# Altium PCB pcb.PcbDoc
Units mm, origin at the board's own origin, x right, y up, seen from the top; angles counter-clockwise.
Board outline 50 x 50 mm, 2 copper layers (Top Layer, Bottom Layer), stack 1.58 mm thick; 18 components, 28 nets, 115 pads, 58 vias.
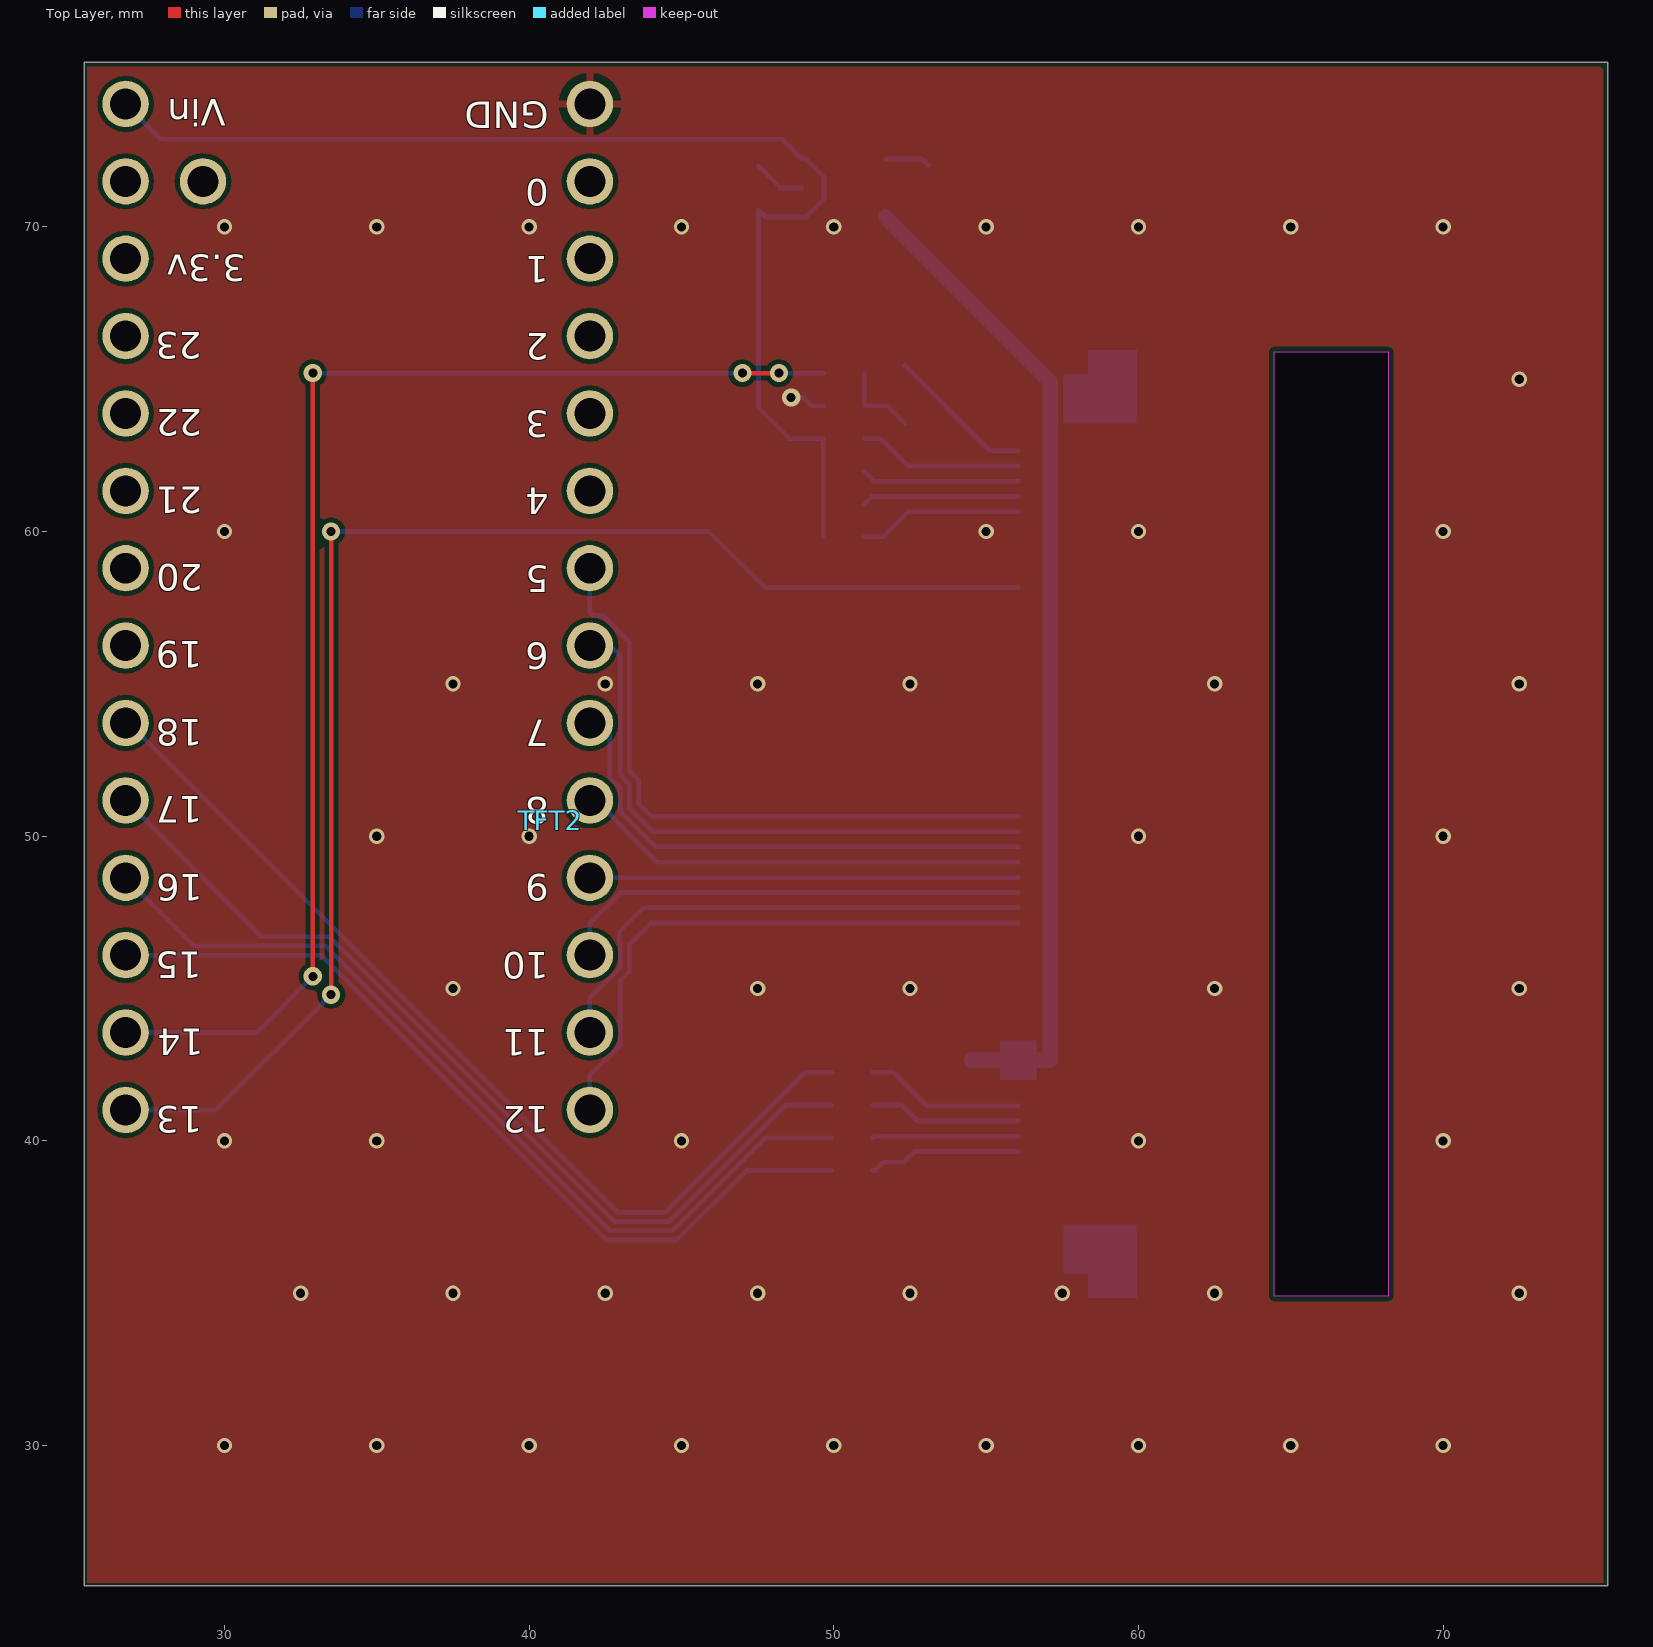
[diagram p0: Top Layer view]
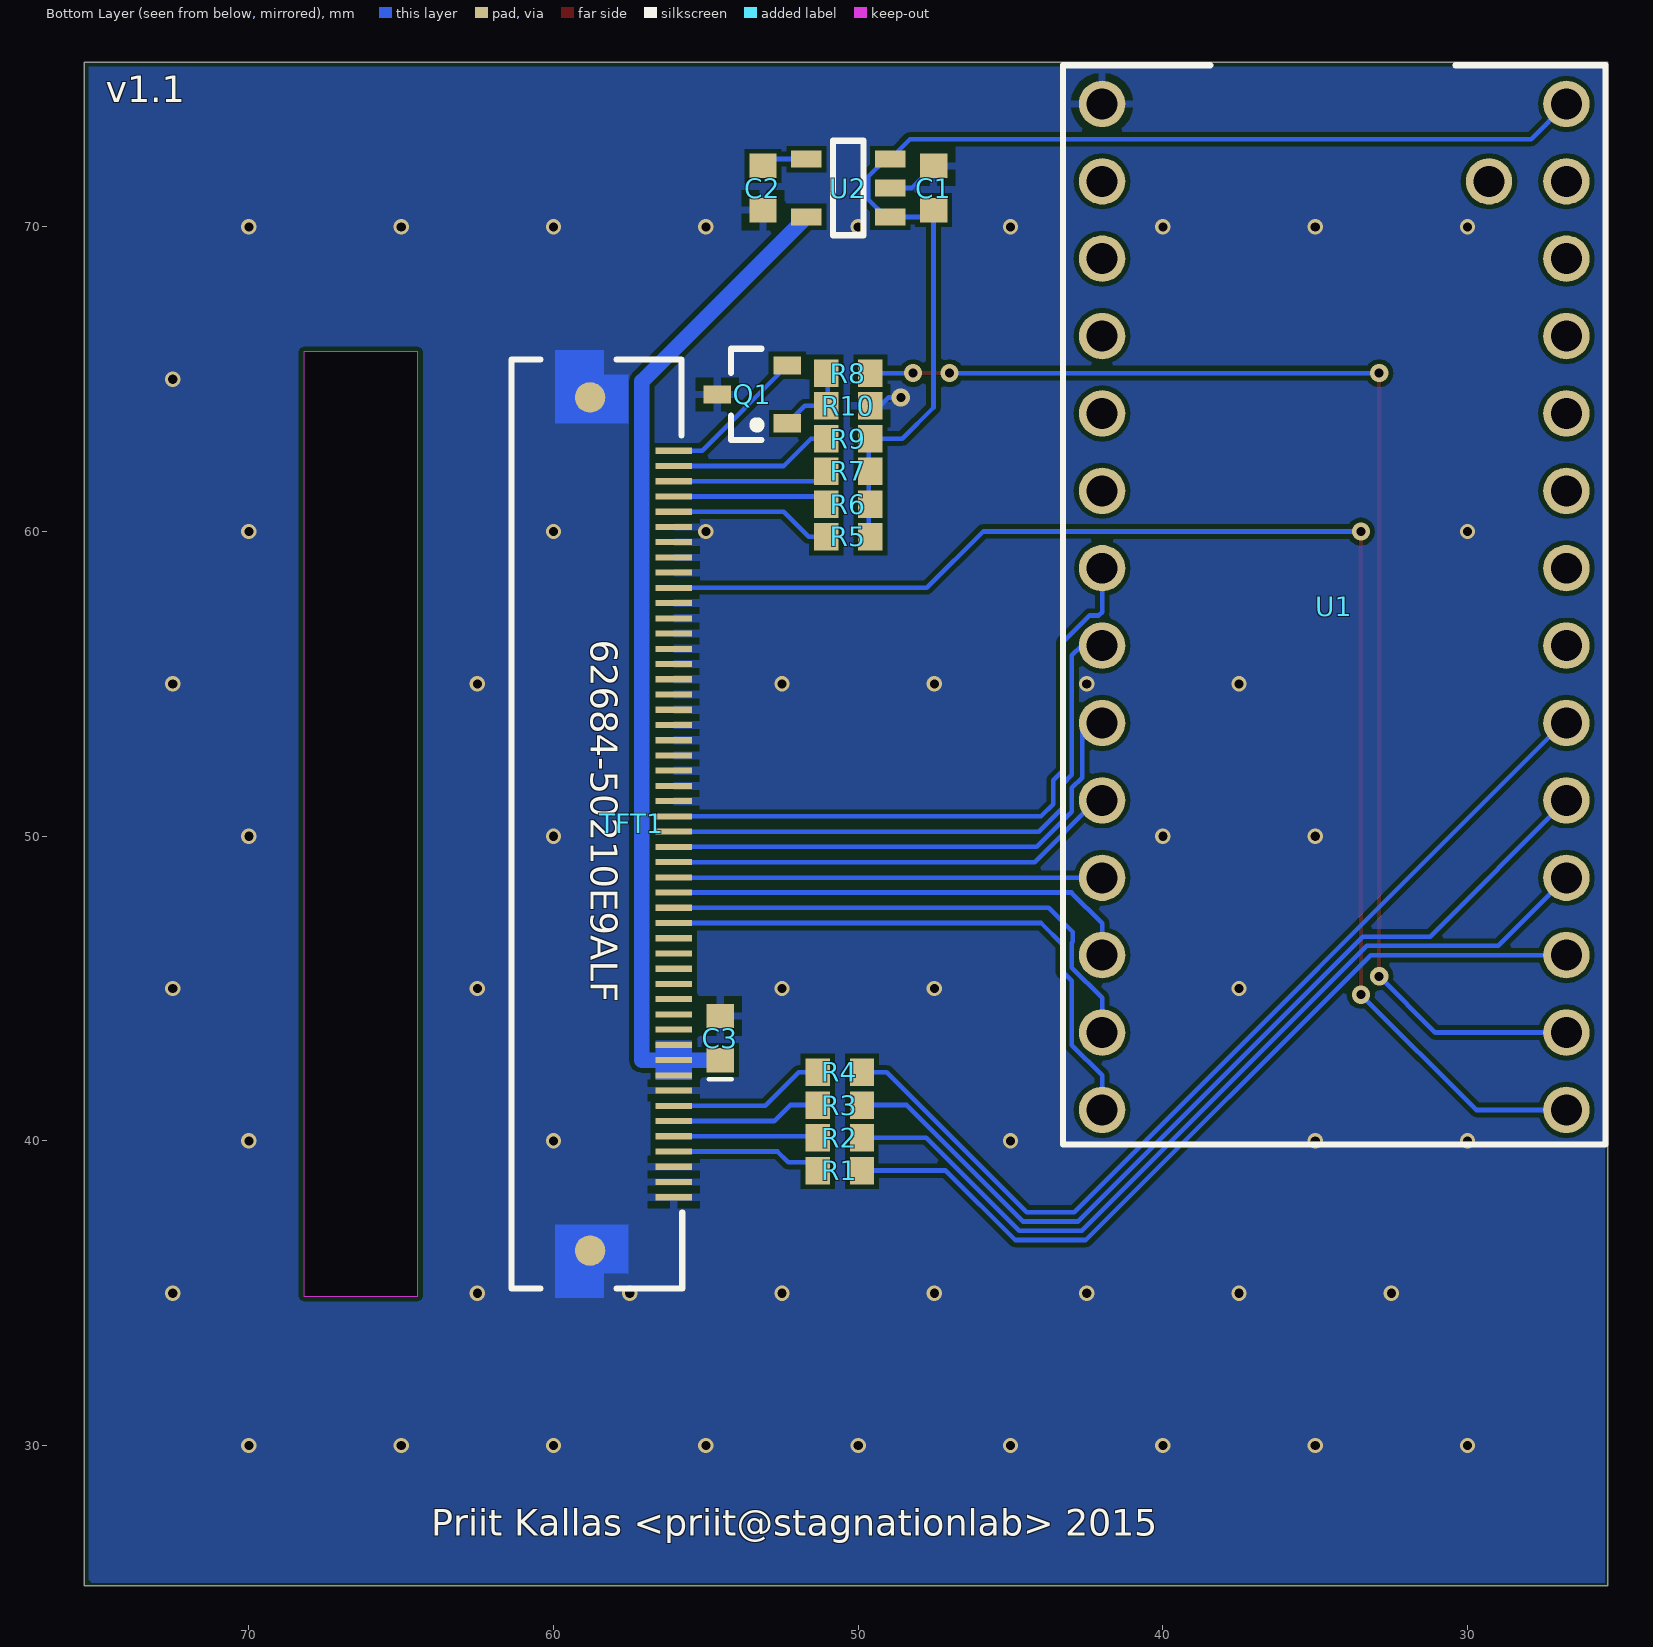
[diagram p1: Bottom Layer view, seen from below]

## Layer stack, top to bottom
Top Solder: solder mask 0.0102, Solder Resist, Dk 3.5
Top Layer: signal copper 0.0356
Dielectric 1: dielectric 1.509, FR-4, Dk 4.8
Bottom Layer: signal copper 0.0356
Bottom Solder: solder mask 0.0102, Solder Resist, Dk 3.5

## Board outline
25.4,25.4 25.4,75.4 75.4,75.4 75.4,25.4

## Design rules (kind name [scope] priority, off if disabled: settings)
Clearance [All] p1: gap=0.152
DiffPairsRouting [All] p1: maxlimit=0.254 minlimit=0.254 mostfreqgap=0.254 toplayer_minwidth=0.152 toplayer_maxwidth=0.381 toplayer_prefwidth=0.152 bottomlayer_minwidth=0.152 bottomlayer_maxwidth=0.381 bottomlayer_prefwidth=0.152 maxuncoupledlength=12.7
HoleSize [All] p1: absolutevalues=TRUE maxlimit=6.35 minlimit=0.3 maxpercent=80.000 minpercent=20.000
MinimumSolderMaskSliver [All] p1: minsoldermaskwidth=0.152
PlaneClearance [All] p1: clearance=0.25
PlaneConnect [All] p1: planeconnectstyle=Relief reliefexpansion=0.5 reliefentries=4 reliefconductorwidth=0.254 reliefairgap=0.254
PolygonConnect PolygonConnect-GND-VIA [InNet('GND') AND IsVia] p1: connectstyle=Direct reliefconductorwidth=0.254 reliefentries=4 polygonreliefangle="90 Angle" airgapwidth=0.254
PolygonConnect [All] p2: connectstyle=Relief reliefconductorwidth=0.254 reliefentries=4 polygonreliefangle="90 Angle" airgapwidth=0.254
RoutingVias [All] p1: holewidth=0.3 width=0.6 viastyle="Through Hole" minholewidth=0.3 minwidth=0.6 maxholewidth=6.35 maxwidth=8
SilkToSilkClearance [All] p1: silktosilkclearance=0
SilkToSolderMaskClearance [IsPad] p1: minsilkscreentomaskgap=0.05 clearancetoexposedcopper=TRUE
SolderMaskExpansion [All] p1: expansion=0.102
UnpouredPolygon [All] p1: allowunpoured=FALSE
Width [All] p1: maxlimit=4 minlimit=0.152 preferedwidth=0.152
22 further rules are at their usual default settings.

## Components (designator, comment, footprint, x,y, rotation, side; value= is the part's Value field where it differs from the comment)
C1 "CAPACITOR" CAP-0603-GEN 47.525,71.275 r270 bottom
C2 "CAPACITOR" CAP-0603-GEN 53.125,71.275 r90 bottom
C3 "CAPACITOR-POLARIZED" CAP-0603-POL 54.525,43.375 r90 bottom
Q1 "Mosfet N" SOT23-3 53.475,64.5 r0 bottom
R1 "RESISTOR" RESISTOR-0603 50.6,39.025 r180 bottom
R2 "RESISTOR" RESISTOR-0603 50.6,40.1 r180 bottom
R3 "RESISTOR" RESISTOR-0603 50.6,41.175 r180 bottom
R4 "RESISTOR" RESISTOR-0603 50.6,42.25 r180 bottom
R5 "RESISTOR" RESISTOR-0603 50.325,59.825 r180 bottom
R6 "RESISTOR" RESISTOR-0603 50.325,60.9 r180 bottom
R7 "RESISTOR" RESISTOR-0603 50.325,61.975 r180 bottom
R8 "RESISTOR" RESISTOR-0603 50.325,65.2 r180 bottom
R9 "RESISTOR" RESISTOR-0603 50.325,63.05 r180 bottom
R10 "Resistor" RESISTOR-0603 50.325,64.125 r180 bottom
TFT1 "TFT" FCI-62684-50210E9ALF 56.3,50.4 r270 bottom
TFT2 "Screen" MI0283QT 40.7,50.525 r0 top locked
U1 "TEENSY-3.1" TEENSY-3.1 34.375,57.525 r270 bottom
U2 "Reg" SOT23-5 50.325,71.275 r0 bottom

## Footprints (in the part's own frame and the unit in brackets; to place one, negate y for a bottom-side part, rotate by r counter-clockwise, add the part's x,y. Pads: shape width x height; smd on the part's side, far side on the other; paste and mask are expansions set on the pad)
CAP-0603-GEN [mm] "Non-polarized 0603 (1608) chip capacitor"
  rect 0.8x0.9 smd: 1(-0.725,0) 2(0.725,0)
  body extent -0.8,-0.4 0.8,0.4, height 0.86
CAP-0603-POL [mm] "0603 (1608) polarized chip capacitor"
  rect 0.8x0.9 smd: 1(-0.725,0) 2(0.725,0)
  silkscreen extent -1.35,-0.38 -1.35,0.38, body extent -0.8,-0.4 0.8,0.4, height 0.86
FCI-62684-50210E9ALF [mm] "FCI 50 pin FPC 0.5mm pitch connector"
  rect 0.2x1.2 smd mask+0.152: 1(-12.25,0.25) 2(-11.75,0.25) 3(-11.25,0.25) 4(-10.75,0.25) 5(-10.25,0.25) 6(-9.75,0.25) 7(-9.25,0.25) 8(-8.75,0.25) 9(-8.25,0.25) 10(-7.75,0.25) 11(-7.25,0.25) 12(-6.75,0.25) 13(-6.25,0.25) 14(-5.75,0.25) 15(-5.25,0.25) 16(-4.75,0.25) 17(-4.25,0.25) 18(-3.75,0.25) 19(-3.25,0.25) 20(-2.75,0.25) 21(-2.25,0.25) 22(-1.75,0.25) 23(-1.25,0.25) 24(-0.75,0.25) 25(-0.25,0.25) 26(0.25,0.25) 27(0.75,0.25) 28(1.25,0.25) 29(1.75,0.25) 30(2.25,0.25) 31(2.75,0.25) 32(3.25,0.25) 33(3.75,0.25) 34(4.25,0.25) 35(4.75,0.25) 36(5.25,0.25) 37(5.75,0.25) 38(6.25,0.25) 39(6.75,0.25) 40(7.25,0.25) 41(7.75,0.25) 42(8.25,0.25) 43(8.75,0.25) 44(9.25,0.25) 45(9.75,0.25) 46(10.25,0.25) 47(10.75,0.25) 48(11.25,0.25) 49(11.75,0.25) 50(12.25,0.25)
  round 1 smd: 49(-14,-2.5) 50(14,-2.5)
  Top Layer region: 13.15,-1.25 13.15,-3.65 15.55,-3.65 15.55,-2.05 14.75,-2.05 14.75,-1.25
  Top Layer region: -13.15,-1.25 -13.15,-3.65 -15.55,-3.65 -15.55,-2.05 -14.75,-2.05 -14.75,-1.25
  Keep-Out Layer board cut-out: -15.5,-8.15 -15.5,-11.9 15.5,-11.9 15.5,-8.15
  silkscreen extent -15.25,-5.07 15.25,0.53, body extent -15.25,-5.08 15.25,0.52, height 2
MI0283QT [mm] "MI0283QT TFT"
  body extent -34.57,-25.12 34.68,24.88, height 4.2
RESISTOR-0603 [mm] "Chip resistor 0603 (1608)"
  rect 0.8x0.9 smd: 1(-0.725,0) 2(0.725,0)
  body extent -0.8,-0.4 0.8,0.4, height 0.5
SOT23-3 [mm] "SOT23 3-leads mosfet"
  rect 0.9x0.6 smd: 1(-1.15,0.95) 2(-1.15,-0.95) 3(1.15,0)
  silkscreen extent -0.3,-1.5 0.7,1.5, body extent -1.4,-1.45 1.4,1.45, height 1.3
SOT23-5 [mm] "SOT23 5-Leads"
  rect 1x0.55 smd: 1(-1.375,0.95) 2(-1.375,0) 3(-1.375,-0.95) 4(1.375,-0.95) 5(1.375,0.95)
  silkscreen extent -0.5,-1.55 0.5,1.55, body extent -1.4,-1.45 1.4,1.45, height 1.45
TEENSY-3.1 [mil] "Teensy 3.1 breakout"
  round 60 hole 40: 0(-550,-300) 1(-450,-300) 2(-350,-300) 3(-250,-300) 3.3v(-450,300) 4(-150,-300) 5(-50,-300) 6(50,-300) 7(150,-300) 8(250,-300) 9(350,-300) 10(450,-300) 11(550,-300) 12(650,-300) 13(650,300) 14(550,300) 15(450,300) 16(350,300) 17(250,300) 18(150,300) 19(50,300) 20(-50,300) 21(-150,300) 22(-250,300) 23(-350,300) AGND(-550,300) GND(-650,-300) Vin(-650,300) Vusb(-550,200)
  silkscreen extent -700,-350 695,350, body extent -763,-354 699,354, height 271

## Part data
C1 C2: "Capacitor"
C3: "Polarized capacitor"
Q1: library part MOSFET-N, "N-channel mosfet"
R1 R2 R3 R4 R5 R6 R7 R8 R9: "Resistor"
R10: library part RESISTOR
TFT1: library part MI0283QT-11, "MI0283QT 2.8\" TFT"
TFT2: library part MI0283QT, "MI0283QT TFT screen"
U1: "Teensy 3.1 breakout"
U2: library part SOT23-REG, "Voltage regulator"

## Via types
v1: diameter 0.5, hole 0.3, Top Layer to Bottom Layer, tented both sides, 51 vias
v2: diameter 0.6, hole 0.3, Top Layer to Bottom Layer, tented both sides, 7 vias

## Nets (pads, with @x,y where several pads share a name; then routed paths per layer and width w, separated by ;. In a path a pad name is that pad's centre, name@x,y a point inside that pad or via, vN(x,y) a via of type N, cw(c..) or ccw(c..) an arc to the next point about the centre after c; other vN are vias at no path point)
3V3: C3.1 TFT1.40 TFT1.41 TFT1.42 U2.5 | length 32.5
  Bottom Layer w0.508: U2.5 57.1,64.925 57.1,42.65 TFT1.41 C3.1
GND: C1.1 C2.1 C3.2 Q1.3 R10.2 TFT1.6 TFT1.7 TFT1.8 TFT1.9 TFT1.11 TFT1.12 TFT1.13 TFT1.14 TFT1.15 TFT1.16 TFT1.17 TFT1.18 TFT1.19 TFT1.20 TFT1.21 TFT1.22 TFT1.23 TFT1.24 TFT1.43 TFT1.48 TFT1.49 TFT1.50 U1.GND U2.2 | length 2.9
  Bottom Layer w0.152: C1.1 48.25,71.275 U2.2 ; v2(48.6,64.4) 49,64.4 49.275,64.125 R10.2@49.65,64.125
  other v1: 30,30 35,30 40,30 45,30 50,30 55,30 60,30 65,30 70,30 32.5,35 37.5,35 42.5,35 47.5,35 52.5,35 57.5,35 62.5,35 72.5,35 30,40 35,40 45,40 60,40 70,40 37.5,45 47.5,45 52.5,45 62.5,45 72.5,45 35,50 40,50 60,50 70,50 37.5,55 42.5,55 47.5,55 52.5,55 62.5,55 72.5,55 30,60 55,60 60,60 70,60 72.5,65 30,70 35,70 40,70 45,70 50,70 55,70 60,70 65,70 70,70
LCD_BACKLIGHT: R8.2 U1.14 | length 43.5
  Top Layer w0.152: v2(32.9,45.4) v2(32.9,65.2) ; v2(47,65.2) v2(48.2,65.2)
  Bottom Layer w0.152: U1.14 31.055,43.555 v2(32.9,45.4) ; v2(32.9,65.2) v2(47,65.2) ; v2(48.2,65.2) R8.2@49.65,65.2
LCD_D0: TFT1.32 U1.12 | length 19
  Bottom Layer w0.152: U1.12 41.995,42.154 42.986,43.145 42.986,45.254 43.29,45.558 43.29,46.44 44,47.15 TFT1.32
LCD_D1: TFT1.31 U1.11 | length 17.1
  Bottom Layer w0.152: U1.11 41.995,44.694 42.986,45.685 42.986,46.505 42.955,46.536 42.955,46.855 43.75,47.65 TFT1.31
LCD_D2: TFT1.30 U1.10 | length 15.5
  Bottom Layer w0.152: U1.10 41.995,47.145 43,48.15 TFT1.30
LCD_D3: TFT1.29 U1.9 | length 14.1
  Bottom Layer w0.152: U1.9 56.05,48.635 TFT1.29
LCD_D4: TFT1.28 U1.8 | length 14.9
  Bottom Layer w0.152: U1.8 42.182,51.175 44.207,49.15 TFT1.28
LCD_D5: TFT1.27 U1.7 | length 17.2
  Bottom Layer w0.152: U1.7 42.65,53.715 42.65,51.921 42.986,51.585 42.986,50.802 44.138,49.65 TFT1.27
LCD_D6: TFT1.26 U1.6 | length 19.3
  Bottom Layer w0.152: U1.6 42.664,56.255 42.986,55.933 42.986,52.016 43.29,51.712 43.29,50.929 44.069,50.15 TFT1.26
LCD_D7: TFT1.25 U1.5 | length 21.2
  Bottom Layer w0.152: U1.5 41.995,57.355 42.104,57.246 42.405,57.246 43.29,56.361 43.29,52.143 43.595,51.838 43.595,51.055 44,50.65 TFT1.25
LCD_RESET: TFT1.10 U1.13 | length 46.8
  Top Layer w0.152: v2(33.5,44.8) v2(33.5,60)
  Bottom Layer w0.152: U1.13 29.715,41.015 v2(33.5,44.8) ; v2(33.5,60) 45.9,60 47.75,58.15 TFT1.10
LCD_X+: R4.2 U1.18 | length 31.7
  Bottom Layer w0.152: U1.18 26.853,53.715 42.909,37.66 44.466,37.66 49.057,42.25 R4.2@49.925,42.25
LCD_X-: R2.2 U1.16 | length 29.2
  Bottom Layer w0.152: U1.16 28.99,46.4 33.306,46.4 42.656,37.05 44.719,37.05 47.769,40.1 R2.2@49.925,40.1
LCD_Y+: R3.2 U1.17 | length 30.5
  Bottom Layer w0.152: U1.17 31.225,46.705 33.433,46.705 42.782,37.355 44.593,37.355 48.413,41.175 R3.2@49.925,41.175
LCD_Y-: R1.2 U1.15 | length 28
  Bottom Layer w0.152: U1.15 33.18,46.095 42.53,36.745 44.845,36.745 47.125,39.025 R1.2@49.925,39.025
NetC2_2: C2.2 U2.4 | length 1.5
  Bottom Layer w0.152: U2.4 52.9,72.225 C2.2
NetQ1_1: Q1.1 R8.1 R10.1 | length 2.6
  Bottom Layer w0.152: R8.1@51,65.2 51,64.125 51.75,64.125 Q1.1
NetQ1_2: Q1.2 TFT1.1 | length 4.9
  Bottom Layer w0.152: Q1.2 55.125,62.65 TFT1.1
NetR1_1: R1.1 TFT1.47 | length 5
  Bottom Layer w0.152: R1.1@51.275,39.025 51.348,39.025 51.623,39.3 52.3,39.3 52.65,39.65 TFT1.47
NetR2_1: R2.1 TFT1.46 | length 4.8
  Bottom Layer w0.152: R2.1@51.275,40.1 51.325,40.15 TFT1.46
NetR3_1: R3.1 TFT1.45 | length 5
  Bottom Layer w0.152: R3.1@51.275,41.175 52.225,41.175 52.75,40.65 TFT1.45
NetR4_1: R4.1 TFT1.44 | length 5.2
  Bottom Layer w0.152: R4.1@51.275,42.25 51.95,42.25 53.05,41.15 TFT1.44
NetR5_1: R5.1 TFT1.5 | length 5.4
  Bottom Layer w0.152: R5.1@51,59.825 51.625,59.825 52.45,60.65 TFT1.5
NetR6_1: R6.1 TFT1.4 | length 5.2
  Bottom Layer w0.152: R6.1@51,60.9 51.25,61.15 TFT1.4
NetR7_1: R7.1 TFT1.3 | length 5.2
  Bottom Layer w0.152: R7.1@51,61.975 51.325,61.65 TFT1.3
NetR9_1: R9.1 TFT1.2 | length 5.4
  Bottom Layer w0.152: R9.1@51,63.05 51.55,63.05 52.45,62.15 TFT1.2
VCC: C1.2 R5.2 R6.2 R7.2 R9.2 U1.Vin U2.1 U2.3 | length 39.4
  Bottom Layer w0.152: U1.Vin 27.915,72.875 48.3,72.875 U2.3 49.098,72.225 49.679,71.645 49.679,70.905 49.098,70.325 U2.1 47.75,70.325 C1.2 47.529,70.546 47.529,64.071 48.55,63.05 49.65,63.05 R5.2@49.65,59.825
pads on no net: TFT1.33 TFT1.34 TFT1.35 TFT1.36 TFT1.37 TFT1.38 TFT1.39 U1.0 U1.1 U1.2 U1.3 U1.3.3v U1.4 U1.19 U1.20 U1.21 U1.22 U1.23 U1.AGND U1.Vusb

## Polygon pours and split planes (outlines as drawn)
GND on Bottom Layer "Bottom GND" (solid, pour order 4): 75.25,75.25 75.25,25.5 25.5,25.5 25.5,75.25
GND on Top Layer "Top GND" (solid, pour order 3): 25.5,75.25 75.25,75.25 75.25,25.5 25.5,25.5

## Other copper
Bottom Layer:
  rectangle net 3V3: 55.45,42 56.65,43.3

## Silkscreen, mask and mechanical layers (free items; w line width, h text height)
Bottom Overlay:
  text "v1.1" at 74.7,73.8 h1.5
  text "Priit Kallas <priit@stagnationlab> 2015" at 64.015,26.75 h1.5
Mechanical 1:
  lines w0.2: 25.4,25.4 75.4,25.4 75.4,75.4 25.4,75.4 25.4,25.4 ; 64.8,34.9 64.8,65.9 68.3,65.9 68.3,34.9 64.8,34.9

## Text inside footprints (layer, text, board x,y; h text height)
TFT1: Bottom Overlay "62684-50210E9ALF" at 59.069,56.447 h1.52 r90
U1: Top Overlay "1" at 40.65,69.337 h1.5 r180; Top Overlay "2" at 40.65,66.8 h1.5 r180; Top Overlay "5" at 40.65,59.177 h1.5 r180; Top Overlay "6" at 40.65,56.64 h1.5 r180; Top Overlay "9" at 40.65,49.04 h1.5 r180; Top Overlay "10" at 40.65,46.492 h1.5 r180; Top Overlay "0" at 40.65,71.863 h1.5 r180; Top Overlay "GND" at 40.65,74.4 h1.5 r180; Top Overlay "4" at 40.65,61.726 h1.5 r180; Top Overlay "3" at 40.65,64.252 h1.5 r180; Top Overlay "8" at 40.65,51.566 h1.5 r180; Top Overlay "7" at 40.65,54.114 h1.5 r180; Top Overlay "11" at 40.65,43.966 h1.5 r180; Top Overlay "12" at 40.65,41.429 h1.5 r180; Top Overlay "3.3v" at 30.695,69.385 h1.5 r180; Top Overlay "23" at 29.257,66.843 h1.5 r180; Top Overlay "20" at 29.29,59.217 h1.5 r180; Top Overlay "19" at 29.273,56.686 h1.5 r180; Top Overlay "16" at 29.287,49.049 h1.5 r180; Top Overlay "15" at 29.257,46.507 h1.5 r180; Top Overlay "Vin" at 30.038,74.479 h1.5 r180; Top Overlay "21" at 29.265,61.77 h1.5 r180; Top Overlay "22" at 29.272,64.312 h1.5 r180; Top Overlay "17" at 29.273,51.602 h1.5 r180; Top Overlay "18" at 29.278,54.133 h1.5 r180; Top Overlay "14" at 29.318,43.976 h1.5 r180; Top Overlay "13" at 29.262,41.423 h1.5 r180